# Altium PCB 兔子.PcbDoc
Units mm, origin at the board's own origin, x right, y up, seen from the top; angles counter-clockwise.
Board outline 90.8 x 35.56 mm, 2 copper layers (Top Layer, Bottom Layer); 82 components, 84 nets, 333 pads, 72 vias.
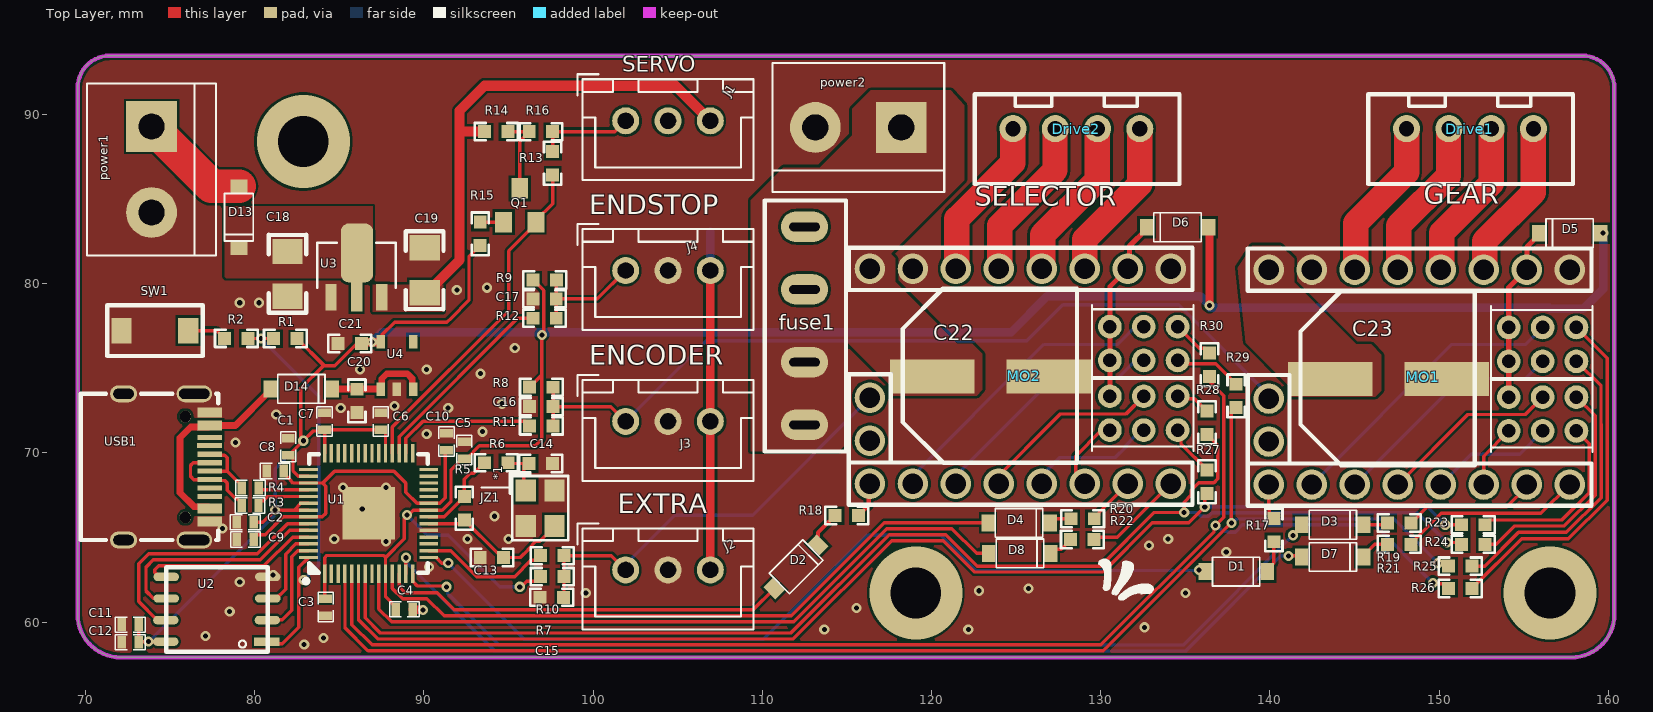
[diagram p0: Top Layer view]
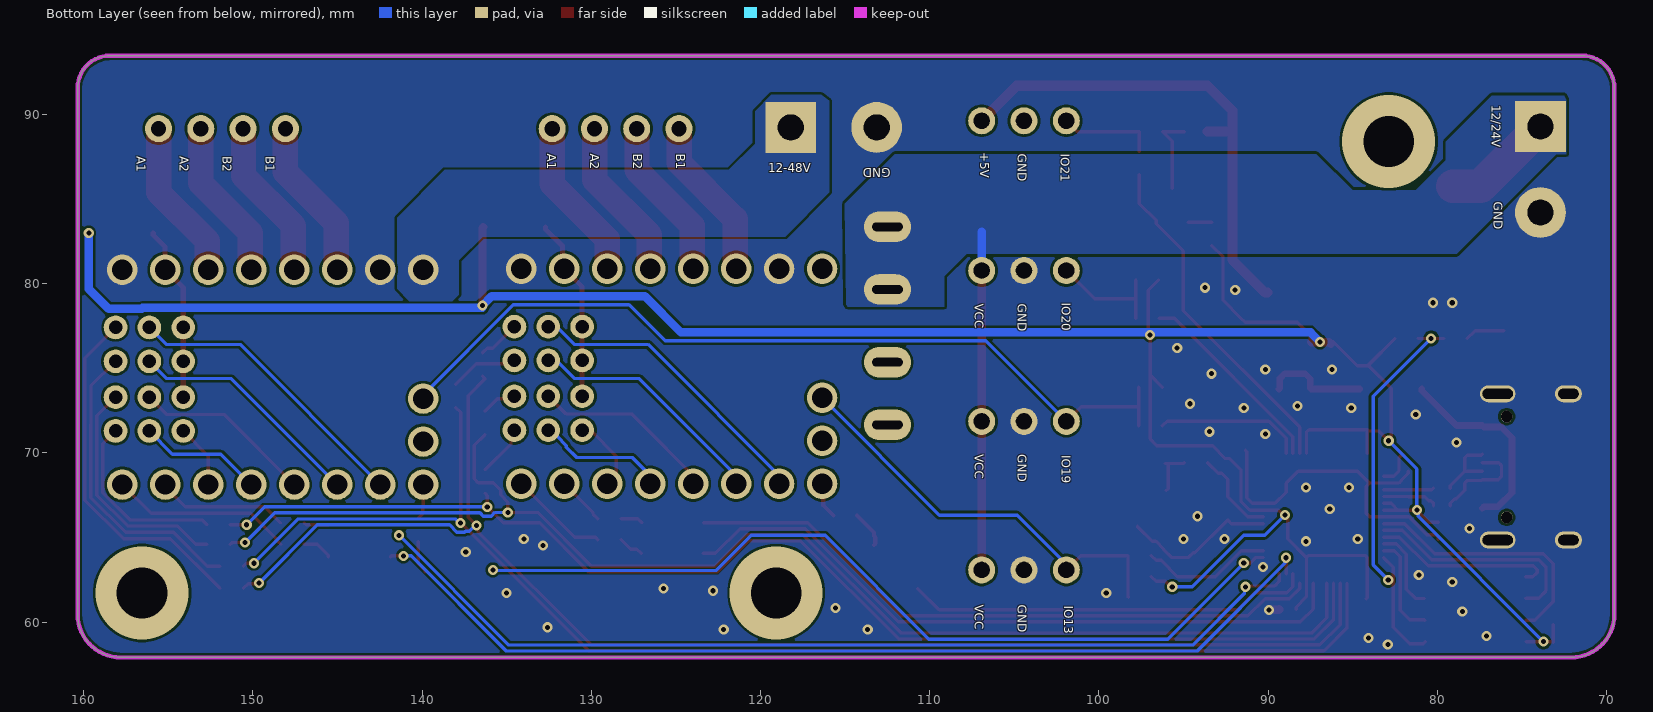
[diagram p1: Bottom Layer view, seen from below]

## Layer stack, top to bottom
Top Solder: solder mask 0.0102, Solder Resist, Dk 3.5
Top Layer: signal copper 0.0356
Dielectric 1: dielectric 0.32, FR-4, Dk 4.8
Bottom Layer: signal copper 0.0356
Bottom Solder: solder mask 0.0102, Solder Resist, Dk 3.5

## Board outline
69.544,60.449 69.544,91.564 cw(c71.449,91.564) 71.449,93.469 158.444,93.469 cw(c158.444,91.564) 160.349,91.564 160.349,60.449 cw(c157.809,60.449) 157.809,57.909 72.084,57.909 cw(c72.084,60.449)

## Design rules (kind name [scope] priority, off if disabled: settings)
Clearance [All] p1: gap=0.152 ignorepadtopadclearanceinfootprint=TRUE
PolygonConnect [All] p1: connectstyle=Direct reliefconductorwidth=0.254 reliefentries=4 polygonreliefangle="90 Angle" airgapwidth=0.254
RoomDefinition POWER [InComponentClass('POWER')] p1: confinementstyle=ConfineIn formatcopy=TRUE lockcomponents=FALSE outline 0,0 50.8,0 50.8,25.4 0,25.4
RoomDefinition Drives [InComponentClass('Drives')] p2: confinementstyle=ConfineIn formatcopy=TRUE lockcomponents=FALSE outline 0,0 50.8,0 50.8,25.4 0,25.4
RoomDefinition 2040 [InComponentClass('2040')] p3: confinementstyle=ConfineIn formatcopy=TRUE lockcomponents=FALSE outline 0,0 50.8,0 50.8,25.4 0,25.4
RoutingVias [All] p1: holewidth=0.711 width=1.27 viastyle="Through Hole" minholewidth=0.711 minwidth=1.27 maxholewidth=0.711 maxwidth=1.27
SolderMaskExpansion [All] p1: expansion=0.102 istentingtop=FALSE
Width [All] p1: maxlimit=10 minlimit=0.1 preferedwidth=0.2
30 further rules are at their usual default settings.

## Classes and differential pairs
component class POWER: C18 C19 C20 C21 D13 D14 fuse1 power1 power2 U3 U4
component class Drives: C22 C23 D1 D2 D3 D4 D5 D6 D7 D8 Drive1 Drive2 MO1 MO2 R17 R18 R19 R20 R21 R22 R23 R24 R25 R26 R27 R28 R29 R30
component class 2040: C1 C2 C3 C4 C5 C6 C7 C8 C9 C10 C11 C12 C13 C14 C15 C16 C17 J1 J2 J3 J4 JZ1 Q1 R1 R2 R3 R4 R5 R6 R7 R8 R9 R10 R11 R12 R13 R14 R15 R16 SW1 U1 U2 USB1

## Components (designator, comment, footprint, x,y, rotation, side; value= is the part's Value field where it differs from the comment)
C1 "0.1UF" C0402 81.991,70.359 r270 top
C2 "0.1UF" C0402 79.451,65.897 r0 top
C3 "0.1UF" C0402 84.201,60.88 r90 top
C4 "0.1UF" C0402 88.847,60.749 r180 top
C5 "0.1UF" C0402 92.395,70.163 r270 top
C6 "0.1UF" C0402 87.462,71.856 r270 top
C7 "0.1UF" C0402 84.138,71.856 r270 top
C8 "0.1UF" C0402 81.212,68.924 r0 top
C9 "0.1UF" C0402 79.459,64.881 r0 top
C10 "0.1UF" C0402 91.342,70.663 r270 top
C11 "2.2UF" C0402 72.652,59.846 r0 top
C12 "0.1UF" C0402 72.652,58.804 r0 top
C13 "22PF" 0603C 95.317,64.369 r180 top
C14 "22PF" 0603C 98.199,69.921 r180 top
C15 "10UF" 0603C 96.266,60.909 r0 top
C16 "10UF" 0603C 95.656,72.18 r0 top
C17 "10UF" 0603C 95.842,78.543 r0 top
C18 "2.2UF" 1206 81.145,82.171 r270 top
C19 "2.2UF" 1206 90.843,79.193 r90 top
C20 "1UF" 0603 85.494,74.356 r270 top
C21 "1UF" 0603 86.914,77.011 r180 top
C22 "100UF/63V" 10*10.5电解电容 123.444,74.519 r90 top
C23 "100UF/63V" 10*10.5电解电容 146.952,74.371 r90 top
D1 "BAT54W" SOD-123 137.998,62.954 r0 top
D2 "BAT54W" SOD-123 112.014,63.246 r45 top
D3 "BAT54W" SOD-123 143.713,65.722 r0 top
D4 "BAT54W" SOD-123 125.171,65.837 r0 top
D5 "BAT54W" SOD-123 157.709,82.998 r180 top
D6 "BAT54W" SOD-123 134.539,83.354 r180 top
D7 "BAT54W" SOD-123 143.713,63.817 r0 top
D8 "BAT54W" SOD-123 125.222,64.033 r0 top
D13 "BAT54W" SOD-123 79.045,83.922 r270 top
D14 "BAT54W" SOD-123 82.758,73.756 r0 top
Drive1 "XH2.54-4" XH2.54-4 145.531,91.186 r0 top
Drive2 "XH2.54-4" XH2.54-4 122.276,91.186 r0 top
fuse1 "fuse" 保险丝小号 115.547,69.854 r90 top
J1 "XH2.54-3" JST_XH_B3B-XH-A_1X03_P2.50MM_VERTICAL -7.291,219.158 r0 top
J2 "XH2.54-3" JST_XH_B3B-XH-A_1X03_P2.50MM_VERTICAL -7.291,192.618 r0 top
J3 "XH2.54-3" JST_XH_B3B-XH-A_1X03_P2.50MM_VERTICAL -7.291,201.396 r0 top
J4 "XH2.54-3" JST_XH_B3B-XH-A_1X03_P2.50MM_VERTICAL -7.291,210.312 r0 top
JZ1 "8MHZ" OSC-3225-4P 96.873,66.714 r270 top
MO1 "AXIS-SPI-UART" AXIS-SPI-UART 159.479,66.873 r90 top
MO2 "AXIS-SPI-UART" AXIS-SPI-UART 135.907,66.924 r90 top locked
power1 "KF-7.62-2P" TERMINALBLOCK_BORNIER-2_P5.08MM_2 155.194,-28.829 r180 top
power2 "KF-7.62-2P" TERMINALBLOCK_BORNIER-2_P5.08MM_2 0.102,7.95 r90 top
Q1 "AO3400" SOT-23 94.592,82.679 r0 top
R1 "10K" 0603 83.109,77.305 r180 top
R2 "1K" 0603 80.216,77.311 r180 top
R3 "27R" R0402 79.731,66.881 r0 top
R4 "27R" R0402 79.748,67.914 r0 top
R5 "1M-DNP" 0603 91.841,68.014 r270 top
R6 "1K" 0603 92.986,68.86 r0 top
R7 "10K" 0603 98.885,63.24 r180 top
R8 "10K" 0603 98.24,74.43 r180 top
R9 "10K" 0603 98.439,80.767 r180 top
R10 "1K" 0603 96.301,63.368 r0 top
R11 "1K" 0603 95.656,71.037 r0 top
R12 "1K" 0603 95.842,77.4 r0 top
R13 "0R-DNP" 0603 97.058,88.408 r270 top
R14 "806R" 0603 95.57,89.532 r180 top
R15 "10K" 0603 93.885,81.645 r90 top
R16 "0R" 0603 98.212,89.53 r180 top
R17 "100R" 0603 139.681,66.729 r270 top
R18 "100R" 0603 116.284,66.846 r180 top
R19 "100R" 0603 148.936,66.403 r180 top
R20 "100R" 0603 130.218,66.657 r180 top
R21 "100R" 0603 148.936,65.145 r180 top
R22 "100R" 0603 130.206,65.427 r180 top
R23 "6.8K" 0603 150.722,65.196 r0 top
R24 "6.8K" 0603 150.722,64.038 r0 top
R25 "6.8K" 0603 149.952,62.752 r0 top
R26 "6.8K" 0603 149.952,61.432 r0 top
R27 "6.8K" 0603 136.83,67.005 r90 top
R28 "6.8K" 0603 136.83,70.482 r90 top
R29 "6.8K" 0603 138.552,72.069 r90 top
R30 "6.8K" 0603 136.977,73.919 r90 top
SW1 "3*4*2H" K 76.861,78.716 r180 top
U1 "" RP2040 86.748,66.403 r90 top
U2 "" SOP-8 80.754,58.217 r90 top
U3 "MD7350H" SOT-89 86.541,79.934 r0 top
U4 "MIC5225-3.3" SOT23-5 86.737,73.056 r0 top
USB1 "TYPEC-304-BCP16" USB-C-SMD_TYPEC-304-BCP16 74.803,69.164 r270 top

## Footprints (in the part's own frame and the unit in brackets; to place one, negate y for a bottom-side part, rotate by r counter-clockwise, add the part's x,y. Pads: shape width x height; smd on the part's side, far side on the other; paste and mask are expansions set on the pad)
10*10.5电解电容 [mm]
  rect 2x5 smd: 1(0,3.4) 2(0,-3.5)
  silkscreen extent -5.1,-5.15 5.18,5.15, body extent -5.12,-5.83 5.18,5.77, height 10.2
0603 [mil]
  rect 30x30 smd: 1(23.62,21.81) 2(78.12,21.75)
  silkscreen extent 1,2 101,42, body extent 19,6 82,38, height 21
0603C [mil]
  rect 30x30 smd: 1(23.62,21.81) 2(78.12,21.75)
  silkscreen extent 1,2 101,42, body extent 20,6 82,38, height 35
1206 [mm]
  rect 1.5x1.8 smd: 1(0.275,0.8) 2(2.925,0.8)
  silkscreen extent -0.71,-0.31 3.9,1.92
AXIS-SPI-UART [mm]
  round 1.8 hole 1.2: 1(1.25,19.55) 2(1.25,17.01) 3(1.25,14.47) 4(1.25,11.93) 5(1.25,9.39) 6(1.25,6.85) 7(1.25,4.31) 8(1.25,1.77) 9(13.95,1.77) 10(13.95,4.31) 11(13.95,6.85) 12(13.95,9.39) 13(13.95,11.93) 14(13.95,14.47) 15(13.95,17.01) 16(13.95,19.55) 29(3.79,19.55) 30(6.33,19.55)
  round 1.4 hole 0.8: 17(4.418,5.368) 18(4.418,3.368) 19(4.418,1.368) 20(6.418,1.368) 21(6.418,3.368) 22(6.418,5.368) 23(8.534,5.368) 24(8.534,3.368) 25(8.534,1.368) 26(10.534,1.368) 27(10.534,3.368) 28(10.534,5.368)
  silkscreen extent 0,0.42 15.2,20.8, body extent 0,0.33 15.25,20.91, height 8.5
C0402 [mm]
  rect 0.5x0.762 smd: 1(0.5,0) 2(-0.5,0)
  silkscreen extent -0.87,-0.46 0.87,0.45, body extent -0.5,-0.25 0.5,0.25, height 0.49
JST_XH_B3B-XH-A_1X03_P2.50MM_VERTICAL [mm]
  round 1.6 hole 0.9: 1(109.22,-129.54) 2(111.72,-129.54) 3(114.22,-129.54)
  round 0 hole 0.95 slot 0.955 at 0 deg: 2(111.72,-129.54) 3(114.22,-129.54) roundrect(109.22,-129.54)
  silkscreen extent 106.37,-133.05 116.78,-126.79, body extent 106.77,-132.92 116.67,-127.17, height 7
K [mm]
  rect 1.2x1.5 smd: 1(0.775,1.5) 2(4.725,1.5)
  silkscreen extent -0.08,0 5.58,3
OSC-3225-4P [mm]
  rect 1.3x1.2 smd: 1(-1.061,-0.852) 2(1.039,-0.852) 3(1.039,0.848) 4(-1.061,0.848)
  silkscreen extent -2.04,-1.75 1.89,1.65, body extent -1.63,-1.28 1.57,1.22, height 0.7
R0402 [mm]
  rect 0.5x0.762 smd: 1(0.5,0) 2(-0.5,0)
  silkscreen extent -0.87,-0.46 0.87,0.45, body extent -0.49,-0.25 0.5,0.26, height 0.38
RP2040 [mm]
  rect 1.1x0.2 smd: 1(-3.538,2.611) 2(-3.538,2.211) 3(-3.538,1.811) 4(-3.538,1.411) 5(-3.538,1.011) 6(-3.538,0.611) 7(-3.538,0.211) 8(-3.538,-0.189) 9(-3.538,-0.589) 10(-3.538,-0.989) 11(-3.538,-1.389) 12(-3.538,-1.789) 13(-3.538,-2.189) 14(-3.538,-2.589) 29(3.562,-2.589) 30(3.562,-2.189) 31(3.562,-1.789) 32(3.562,-1.389) 33(3.562,-0.989) 34(3.562,-0.589) 35(3.562,-0.189) 36(3.562,0.211) 37(3.562,0.611) 38(3.562,1.011) 39(3.562,1.411) 40(3.562,1.811) 41(3.562,2.211) 42(3.562,2.611)
  rect 0.2x1.1 smd: 15(-2.588,-3.539) 16(-2.188,-3.539) 17(-1.788,-3.539) 18(-1.388,-3.539) 19(-0.988,-3.539) 20(-0.588,-3.539) 21(-0.188,-3.539) 22(0.212,-3.539) 23(0.612,-3.539) 24(1.012,-3.539) 25(1.412,-3.539) 26(1.812,-3.539) 27(2.212,-3.539) 28(2.612,-3.539) 43(2.612,3.561) 44(2.212,3.561) 45(1.812,3.561) 46(1.412,3.561) 47(1.012,3.561) 48(0.612,3.561) 49(0.212,3.561) 50(-0.188,3.561) 51(-0.588,3.561) 52(-0.988,3.561) 53(-1.388,3.561) 54(-1.788,3.561) 55(-2.188,3.561) 56(-2.588,3.561)
  rect 3.1x3.1 smd: 57(0.012,0.011)
  silkscreen extent -4.11,-3.49 3.51,3.84
SOD-123 [mm]
  rect 0.8x1 smd: 1(-1.829,0.025) 2(1.829,0.025)
  silkscreen extent -1.4,-0.82 1.4,0.88, body extent -1.9,-0.86 1.95,0.84, height 1.43
SOP-8 [mm]
  rect 0.5x1.5 smd: 1(0.625,0.025)
  oval 0.5x1.5 smd: 2(1.895,0) 3(3.175,-0.025) 4(4.45,-0.025) 5(4.45,5.975) 6(3.175,5.975) 7(1.895,6) 8(0.625,6)
  silkscreen extent 0.03,-0.03 5.03,5.97, body extent 0.07,-0.12 4.98,6.07, height 1.75
SOT23-5 [mm]
  rect 0.5x0.8 smd: 1(0.725,0.7) 2(1.675,0.7) 3(2.625,0.7) 4(2.625,3.5) 5(0.725,3.5)
SOT-23 [mm]
  rect 1x1.2 smd: 1(0.125,0.95) 2(2.025,0.95) 3(1.075,2.95)
  body extent -0.43,0.65 2.57,3.05, height 1.05
SOT-89 [mm]
  rect 0.672x1.575 smd: 1(-2.024,-0.749) 3(0.976,-0.749)
  rect 0.672x1.8 smd: 2(-0.515,-0.68)
  rrect50% 1.9x3.5 smd: 2(-0.493,1.88)
  silkscreen extent -2.85,-0.17 1.8,2.48
TERMINALBLOCK_BORNIER-2_P5.08MM_2 [mm]
  rect 3x3 hole 1.52 slot 1.525 at 90 deg: 1(81.28,-118.11)
  round 3 hole 1.52 slot 1.525 at 90 deg: 2(81.28,-113.03)
  silkscreen extent 77.47,-120.65 85.09,-110.49
USB-C-SMD_TYPEC-304-BCP16 [mm]
  oval 1x2.099 hole 0.6 slot 1.8 at 90 deg: 13(-4.32,1.633) 14(4.32,1.633)
  oval 1x1.599 hole 0.6 slot 1.2 at 90 deg: 15(-4.32,-2.547) 16(4.32,-2.547)
  rect 0.6x1.45 smd: A1B12(-3.225,2.547) A4B9(-2.45,2.547) B1A12(3.22,2.547) B4A9(2.45,2.547)
  rect 0.3x1.45 smd: A5(-1.26,2.532) A6(-0.25,2.547) A7(0.25,2.547) A8(1.25,2.547) B5(1.75,2.547) B6(0.75,2.547) B7(-0.75,2.547) B8(-1.75,2.547)
  round 0.7 hole 0.7 unplated: ""(-2.98,1.102) ""(2.98,1.102)
  silkscreen extent -4.32,-5.08 4.32,3.05, body extent -4.47,-5.06 4.47,2.84, height 3.28
XH2.54-4 [mm]
  round 1.6 hole 0.9: 1(2.54,-2.032) 2(5.04,-2.032) 3(7.54,-2.032) 4(10.033,-2.032)
  silkscreen extent 0.28,-5.3 12.37,0, body extent 0.07,-5.47 12.48,0.28, height 7
保险丝小号 [mm]
  oval 1.8x2.8 hole 1.8 slot 0.5 at 0 deg: 1(1.8,3.05) 1(5.5,3.05) 2(9.8,3.05) 2(13.5,3.05)
  silkscreen extent 0.22,0.6 15.05,5.4

## Part data
C1 C2 C3 C4 C5 C6 C7 C8 C9 C10 C11 C12 C18 C19 C20 C21: library part C
C13 C14 C15 C16 C17: library part 0603C
C22 C23: library part 降压电容
D1 D2 D3 D4 D5 D6 D7 D8 D13 D14: library part Diode, "BAT46W"
JZ1: library part JZ3225
Q1: library part S8050
R1 R2 R5 R6 R7 R8 R9 R10 R11 R12: library part 0603R
R3 R4 R13 R14 R15 R16 R17 R18 R19 R20 R21 R22 R23 R24 R25 R26 R27 R28 R29 R30: library part R
SW1: library part RESET
U1: library part RP2040
U2: library part W25Q16JVSSIQ
USB1: BOM_Manufacturer=XUNPU, BOM_Manufacturer Part=TYPEC-304-BCP16, BOM_Supplier=LCSC, BOM_Supplier Part=C720629, Contributor=LCSC, spicePre=U, spiceSymbolName=TYPEC-304-BCP16

## Free pads (board coordinates)
  round 5.5 on Top Solder: 2(82.879,88.389) 2(119.074,61.719) 2(156.539,61.719)
  round 5.5 on Bottom Solder: 2(82.879,88.389) 2(119.074,61.719) 2(156.539,61.719)

## Via types
v1: diameter 0.6, hole 0.3, Top Layer to Bottom Layer, tented both sides, 69 vias
v2: diameter 5.5, hole 3, Top Layer to Bottom Layer, tented both sides, 3 vias

## Nets (pads, with @x,y where several pads share a name; then routed paths per layer and width w, separated by ;. In a path a pad name is that pad's centre, name@x,y a point inside that pad or via, vN(x,y) a via of type N, cw(c..) or ccw(c..) an arc to the next point about the centre after c; other vN are vias at no path point)
+1.1V: C8.1 C9.1 C10.1 U1.23 U1.45 U1.50 | length 21.1
  Top Layer w0.2: C9.1 79.959,65.012 80.109,65.162 80.625,65.162 81.678,66.215 U1.50 84.001,66.215 84.201,66.415 84.201,68.037 84.023,68.215 ; C8.1 81.712,68.792 82.125,68.379 82.125,68.356 82.267,68.215 U1.45 84.023,68.215 ; C10.1 91.255,70.075 91.255,67.335 90.935,67.015 U1.23 89.596,67.015 88.938,67.674 88.938,68.215 88.238,68.914 84.722,68.914 84.023,68.215
+3.3V: C1.1 C2.1 C3.1 C4.1 C5.1 C6.1 C7.1 C11.1 C12.1 C21.1 D5.1 D6.1 R1.1 R7.2 R8.2 R9.2 R15.1 U1.1 U1.10 U1.22 U1.33 U1.42 U1.44 U1.48 U1.49 U2.8 U4.5 | length 181.5
  Top Layer w0.2: C11.1 C12.1 73.189,58.842 v1(73.736,58.842) U2.8 ; C2.1 80.494,65.897 v1(81.212,66.615) 82.338,66.615 ; C1.1 82.122,69.859 82.272,69.709 82.272,68.924 82.581,68.615 U1.44 ; C1.1@82.074,69.907 v1(82.879,70.712) ; R1.1 84.072,75.189 84.072,75.145 ; U1.49 82.338,66.615 ; U1.48 82.738,67.015 82.338,66.615 ; U1.42 C7.1 ; C3.1 84.138,61.444 U1.1 84.138,63.797 84.274,63.933 87.619,63.933 87.738,63.815 ; C21.1@86.314,76.556 86.146,76.556 84.735,75.145 84.072,75.145 ; U4.5@87.517,76.611 87.517,76.962 88.269,77.714 91.367,77.714 91.607,77.954 92.667,79.014 92.667,81.581 R15.1 ; U1.33 87.738,71.206 87.588,71.356 C6.1 C7.1 ; C4.1 88.347,60.88 87.738,61.49 U1.10 87.738,63.815 ; v1(95.667,62.081) 95.765,62.081 96.09,62.406 96.62,62.406 R7.2 ; R8.2 96.977,74.599 ; R9.2 97.076,79.594 v1@97.076,77.169 ; v1(96.977,76.962) 96.977,74.599 ; v1(82.879,70.712) 82.738,70.854 82.738,73.811 84.072,75.145 ; v1(82.879,70.712) 83.456,71.289 84.071,71.289 C7.1 ; 87.738,63.815 88.847,64.925 88.847,66.101 89.362,66.615 U1.22 91.076,66.615 91.607,67.146 91.607,69.006 92.264,69.663 C5.1 92.526,69.663 93.288,70.424 96.586,70.424 96.977,70.815 96.977,74.599
  Top Layer w0.5: C21.1 86.395,76.539 87.445,76.539 U4.5 ; D6.1 136.425,83.272 v1(136.425,78.711)
  Bottom Layer w0.2: v1(73.736,58.842) 81.135,66.241 81.135,66.538 v1(81.212,66.615) 81.212,69.045 v1(82.879,70.712) ; v1(89.014,66.319) 90.208,65.126 91.445,65.126 94.49,62.081 v1(95.667,62.081)
  Bottom Layer w0.5: v1(86.937,76.556) 87.496,77.114 96.977,77.114 124.697,77.114 126.831,79.248 135.888,79.248 v1(136.425,78.711) ; v1@136.425,78.56 156.516,78.56 156.567,78.51 158.52,78.51 159.69,79.68 v1(159.69,82.982)
+5V: C19.1 J1.3 R14.2 U3.3 | length 29.5
  Top Layer w0.6: C19.1 90.193,79.468 92.114,81.389 92.114,88.978 ; R14.2 92.116,88.979 92.114,88.978 ; J1.3@106.929,89.619 104.854,91.694 93.585,91.694 92.114,90.223 92.114,88.978
DIAG0: C15.2 J2.1 MO2.30 R7.1 R10.2 | length 24.6
  Top Layer w0.2: C15.2 98.285,61.497 R7.1 R10.2 101.087,63.92 J2.1@101.413,63.594
  Bottom Layer w0.2: J2.1 101.929,63.423 104.826,66.319 109.423,66.319 MO2.30
DIAG1: C16.2 J3.1 MO1.30 R8.1 R11.2 | length 50.2
  Top Layer w0.2: R11.2 C16.2 ; R8.1 C16.2 ; J3.1 101.052,72.733 C16.2
  Bottom Layer w0.2: J3.1 106.685,76.612 125.634,76.612 127.768,78.746 134.599,78.746 139.929,73.416 MO1.30
DIAG2: C17.2 J4.1 R9.1 R12.2 | length 7.1
  Top Layer w0.2: R12.2 C17.2 ; R9.1 97.826,80.2 C17.2 ; J4.1 100.253,79.096 C17.2
Drives0-DIR: D8.1 U1.9 | length 40.8
  Top Layer w0.2: 87.341,62.287 87.341,60.767 88.093,60.015 111.859,60.015 117.354,65.51 121.209,65.51 122.66,64.059 D8.1
Drives0-EN: D2.1 U1.12 | length 24
  Top Layer w0.2: U1.12 88.538,62.084 88.773,61.849 88.786,61.849 88.9,61.735 90.792,61.735 91.807,60.72 109.452,60.72 D2.1
Drives0-STEP: D4.1 U1.11 | length 38.5
  Top Layer w0.2: 88.141,62.287 88.141,61.983 88.741,61.382 90.181,61.382 91.196,60.368 111.713,60.368 117.208,65.862 D4.1
Drives1-DIR: D7.1 U1.13 | length 58.7
  Top Layer w0.2: U1.13 v1(88.938,63.797) ; v1(141.097,63.906) 141.821,63.906 D7.1
  Bottom Layer w0.2: v1(88.938,63.797) 89.014,63.72 89.014,63.466 94.192,58.288 135.012,58.288 140.63,63.906 v1(141.097,63.906)
Drives1-EN: D1.1 U1.15 | length 50.9
  Top Layer w0.2: U1.15 90.738,63.815 91.07,63.483 v1(91.445,63.483)
  Bottom Layer w0.2: v1(91.445,63.483) 95.876,59.051 95.935,58.993 110.047,58.993 116.18,65.126 120.548,65.126 122.631,63.043 135.776,63.043 v1(135.813,63.079)
Drives1-STEP: D3.1 U1.14 | length 56.9
  Top Layer w0.2: U1.14 89.338,62.415 89.626,62.127 91.296,62.127 v1(91.342,62.081)
  Bottom Layer w0.2: v1(91.342,62.081) 91.398,62.025 91.398,61.688 94.445,58.64 134.866,58.64 v1(141.351,65.126)
Drives_power: C22.1 C23.1 fuse1.1 MO1.16 MO2.16 power2.1
GND: C1.2 C2.2 C3.2 C4.2 C5.2 C6.2 C7.2 C8.2 C9.2 C10.2 C11.2 C12.2 C13.2 C14.1 C15.1 C16.1 C17.1 C18.2 C19.2 C20.2 C21.2 C22.2 C23.2 J2.2 J3.2 J4.2 JZ1.2 JZ1.4 MO1.9 MO1.15 MO2.9 MO2.15 power1.2 power2.2 SW1.2 U1.19 U1.57 U2.4 U3.1 U4.2 USB1.13 USB1.14 USB1.15 USB1.16 USB1.A1B12 USB1.B1A12 | length 0.6
  Top Layer w0.5: C4.2 89.347,60.723 89.932,60.723 v1(89.951,60.704)
  other v1: 82.931,58.674 84.074,59.055 77.089,59.182 113.665,59.563 122.174,59.563 132.588,59.69 78.529,60.622 115.57,60.833 99.568,61.722 135.001,61.722 122.809,61.849 125.73,61.976 79.121,62.357 81.099,62.784 90.297,63.246 137.414,64.135 132.842,64.516 87.757,64.77 84.709,64.897 92.583,64.897 94.996,64.897 133.985,64.897 78.105,65.532 94.17,66.252 86.36,66.675 85.217,67.945 87.757,67.945 78.867,70.612 90.17,71.12 93.472,71.247 81.28,72.263 85.09,72.644 91.44,72.644 88.265,72.771 94.615,72.898 93.345,74.676 86.233,74.93 90.17,74.93 95.377,76.2 79.121,78.867 80.264,78.867 91.948,79.629 93.726,79.756
MOT_CS/UART0: R24.1 R28.1 U1.7 | length 78.8
  Top Layer w0.2: 86.541,62.287 86.541,60.242 87.431,59.352 111.694,59.352 117.5,65.157 120.847,65.157 122.698,63.306 129.986,63.306 133.155,66.475 v1(134.931,66.475) 134.931,67.091 135.35,67.51 135.35,67.799 135.79,68.239 136.692,68.239 136.911,68.458 136.911,70.447 R28.1 ; v1(150.452,64.7) 151.214,64.7 R24.1
  Bottom Layer w0.2: v1(134.931,66.475) 135.69,66.475 135.915,66.25 136.373,66.25 136.573,66.45 148.703,66.45 v1(150.452,64.7)
MOT_CS/UART1: U1.8
MOT_MISO: R23.1 R27.1 U1.6 | length 73.9
  Top Layer w0.2: 86.141,62.287 86.141,60.144 87.285,58.999 111.84,58.999 117.646,64.805 120.701,64.805 122.552,62.954 130.132,62.954 133.04,65.862 135.204,65.862 v1(136.144,66.802) 136.144,67.474 R27.1 ; v1(150.36,65.748) R23.1@151.32,65.748
  Bottom Layer w0.2: v1(136.144,66.802) 149.306,66.802 v1(150.36,65.748)
MOT_MOSI: R26.1 R30.1 U1.5 | length 82.2
  Top Layer w0.2: 85.741,62.287 85.741,59.846 86.94,58.647 130.004,58.647 136.694,65.338 136.694,65.621 v1(136.771,65.697) ; R30.1 136.277,74.373 137.276,73.374 137.276,66.202 136.791,65.718 v1@136.791,65.677 ; v1(149.631,62.306) 149.67,62.267 150.271,62.267 R26.1
  Bottom Layer w0.2: v1(136.771,65.697) 136.879,65.697 137.209,65.367 137.431,65.367 137.488,65.31 137.946,65.31 138.375,65.738 146.199,65.738 v1(149.631,62.306)
MOT_SCK: R25.1 R29.1 U1.4 | length 79.7
  Top Layer w0.2: 85.341,62.287 85.341,59.652 86.699,58.295 130.15,58.295 v1(137.717,65.862) 137.717,72.388 R29.1 ; v1(149.936,63.475) 150.384,63.475 R25.1
  Bottom Layer w0.2: v1(137.717,65.862) 137.806,65.862 138.034,66.091 147.32,66.091 v1(149.936,63.475)
NetC13_1: C13.1 JZ1.3 R5.2 U1.20 | length 9.3
  Top Layer w0.2: U1.20 92.178,65.815 R5.2 94.327,64.096 94.436,64.096 C13.1 95.707,63.815 96.166,64.275 96.166,64.306 96.626,64.766 96.862,64.766 97.721,65.625 JZ1.3
NetC14_2: C14.2 JZ1.1 R6.2 | length 2.8
  Top Layer w0.2: R6.2 95.015,69.367 C14.2@95.91,69.367 ; JZ1.1 95.91,67.885 C14.2@95.91,69.368 ; C14.2@96.097,69.368 C14.2@95.91,69.368
NetC18_1: C18.1 D13.2 U3.2
NetC20_1: C20.1 D14.2 U4.1 U4.3 | length 6.2
  Top Layer w0.39: D14.2 84.6,73.768 87.449,73.768 U4.1 87.517,73.811 87.517,74.379 87.814,74.676 89.027,74.676 89.307,74.396 89.307,73.811 U4.3
NetD1_2: D1.2 R17.2 | length 1.9
  Top Layer w0.2: D1.2 139.827,63.079 140.233,63.486 R17.2
NetD2_2: D2.2 R18.2 | length 2.2
  Top Layer w0.254: D2.2 113.218,64.628 113.218,65.014 113.289,65.085 113.289,65.283 R18.2
NetD3_2: D3.2 R19.2 | length 1.5
  Top Layer w0.2: D3.2 146.848,65.748 R19.2
NetD4_2: D4.2 R20.2 | length 1.3
  Top Layer w0.2: D4.2 127.243,66.105 R20.2
NetD5_2: D5.2 MO1.10 MO1.22 MO1.23 MO1.28 | length 10.4
  Top Layer w0.3: MO1.22 MO1.23 MO1.28 154.111,79.765 MO1.10 155.18,80.835 155.18,82.173 155.88,82.872 D5.2
NetD6_2: D6.2 MO2.10 MO2.22 MO2.23 MO2.28 | length 10.9
  Top Layer w0.3: MO2.22 MO2.23 MO2.28 130.539,79.816 MO2.10 131.705,80.981 131.705,82.224 132.711,83.229 D6.2
NetD7_2: D7.2 R21.2 | length 1.8
  Top Layer w0.2: D7.2 145.542,63.943 146.191,64.592 R21.2
NetD8_2: D8.2 R22.2 | length 1.5
  Top Layer w0.2: D8.2 127.302,64.31 127.658,64.31 R22.2
NetDrive1_1: Drive1.1 MO1.14 | length 9.6
  Top Layer w1.5: MO1.14 145.066,80.88 145.066,83.573 148.071,86.578 Drive1.1
NetDrive1_2: Drive1.2 MO1.13 | length 9.6
  Top Layer w1.5: MO1.13 147.606,80.88 147.606,83.42 150.552,86.366 150.552,89.135 Drive1.2
NetDrive1_3: Drive1.3 MO1.12 | length 9.6
  Top Layer w1.5: MO1.12 150.146,80.88 150.146,82.998 153.071,85.923 Drive1.3
NetDrive1_4: Drive1.4 MO1.11 | length 9.5
  Top Layer w1.5: MO1.11 152.686,80.88 152.686,82.506 155.564,85.384 Drive1.4
NetDrive2_1: Drive2.1 MO2.14 | length 9.7
  Top Layer w1.5: MO2.14 121.495,80.931 121.495,83.827 124.796,87.128 124.796,89.135 Drive2.1
NetDrive2_2: Drive2.2 MO2.13 | length 9.7
  Top Layer w1.5: MO2.13 124.035,80.931 124.035,83.429 127.296,86.691 127.296,89.135 Drive2.2
NetDrive2_3: Drive2.3 MO2.12 | length 9.6
  Top Layer w1.5: MO2.12 126.575,80.931 126.575,82.888 129.796,86.11 129.796,89.135 Drive2.3
NetDrive2_4: Drive2.4 MO2.11 | length 9.6
  Top Layer w1.5: MO2.11 129.057,82.626 132.309,85.877 Drive2.4
NetJ1_1: J1.1 R13.1 R16.1 | length 5.8
  Top Layer w0.2: R13.1 R16.1 101.287,88.976 J1.1
NetMO1_1: MO1.1 R17.1 | length 2.1
  Top Layer w0.2: MO1.1 139.929,66.91 139.954,66.884 139.954,66.41 R17.1
NetMO1_2: MO1.2 MO1.27 | length 17.5
  Bottom Layer w0.2: MO1.2 150.749,76.403 155.107,76.403 MO1.27
NetMO1_3: MO1.3 MO1.24 | length 14.1
  Bottom Layer w0.2: MO1.3 151.275,74.389 155.092,74.389 MO1.24
NetMO1_4: MO1.4 MO1.21 | length 10.7
  Top Layer w0.2: MO1.4 151.689,72.263 155.083,72.263 MO1.21
NetMO1_5: MO1.5 MO1.18 | length 7.3
  Bottom Layer w0.2: MO1.5 151.892,69.926 154.746,69.926 MO1.18
NetMO1_6: MO1.6 MO1.17 | length 3.8
  Top Layer w0.2: MO1.6 152.629,69.808 MO1.17
NetMO1_7: MO1.7 R19.1 | length 7.9
  Top Layer w0.2: R19.1 149.288,66.802 154,66.802 155.169,67.97 MO1.7
NetMO1_8: MO1.8 R21.1 | length 10.9
  Top Layer w0.2: R21.1 148.617,64.872 148.617,64.918 150.12,66.421 156.007,66.421 MO1.8
NetMO1_19: MO1.19 R23.2 | length 10.9
  Top Layer w0.2: R23.2 152.987,66.029 157.244,66.029 158.861,67.645 158.861,69.535 158.857,69.54 158.857,70.544 MO1.19
NetMO1_20: MO1.20 R24.2 | length 14
  Top Layer w0.2: R24.2 153.374,64.591 154.46,65.677 157.39,65.677 159.213,67.499 159.213,69.681 159.209,69.686 159.209,72.192 MO1.20
NetMO1_25: MO1.25 R25.2 | length 18
  Top Layer w0.2: R25.2 152.687,63.305 154.686,65.303 157.516,65.303 159.566,67.354 159.566,71.701 159.561,71.706 159.561,73.956 MO1.25
NetMO1_26: MO1.26 R26.2 | length 21.1
  Top Layer w0.2: R26.2 154.87,64.918 157.628,64.918 159.918,67.208 159.918,75.6 MO1.26
NetMO2_1: MO2.1 R18.1 | length 2.2
  Top Layer w0.254: R18.1 116.285,66.893 116.285,68.101 MO2.1
NetMO2_2: MO2.2 MO2.27 | length 17.5
  Bottom Layer w0.2: MO2.2@118.364,68.123 126.644,76.403 131.002,76.403 MO2.27@132.006,77.407
NetMO2_3: MO2.3 MO2.24 | length 14.1
  Bottom Layer w0.2: MO2.3@120.904,68.123 127.17,74.389 130.988,74.389 MO2.24@132.006,75.407
NetMO2_4: MO2.4 MO2.21 | length 11.3
  Top Layer w0.2: MO2.4@123.444,68.123 127.615,72.294 131.492,72.294 MO2.21
NetMO2_5: MO2.5 MO2.18 | length 7.6
  Bottom Layer w0.2: MO2.5@125.984,68.123 127.584,69.723 130.861,69.723 131.47,70.333 131.47,70.43 132.006,70.966 MO2.18@132.006,71.29
NetMO2_6: MO2.6 MO2.17 | length 3.8
  Top Layer w0.2: MO2.6@128.524,68.123 128.524,69.808 MO2.17@130.006,71.29
NetMO2_7: MO2.7 R20.1 | length 2.6
  Top Layer w0.2: R20.1 129.899,66.385 129.899,66.475 131.075,67.651 131.075,68.112 MO2.7@131.064,68.123
NetMO2_8: MO2.8 R22.1 | length 5.6
  Top Layer w0.2: R22.1 129.736,65.002 130.966,65.002 133.615,67.651 MO2.8@133.615,68.112
NetMO2_19: MO2.19 R27.2 | length 3.3
  Top Layer w0.2: MO2.19@134.036,71.29 134.236,71.29 134.74,70.787 134.74,70.527 R27.2
NetMO2_20: MO2.20 R28.2 | length 2.1
  Top Layer w0.2: MO2.20 134.676,73.204 135.539,73.204 R28.2
NetMO2_25: MO2.25 R29.2 | length 4.6
  Top Layer w0.2: MO2.25@134.012,75.402 134.143,75.27 136.791,75.27 137.276,74.785 137.276,74.778 R29.2
NetMO2_26: MO2.26 R30.2 | length 3
  Top Layer w0.2: MO2.26@134.006,77.407 134.59,77.407 135.813,76.184 136.144,76.184 R30.2
NetQ1_1: Q1.1 R15.2 | length 1.4
  Top Layer w0.2: R15.2 Q1.1
NetQ1_3: Q1.3 R14.1 R16.2 | length 4.8
  Top Layer w0.2: R14.1 R16.2 95.667,88.417 Q1.3
NetR2_2: R2.2 SW1.1 | length 2.3
  Top Layer w0.2: SW1.1 77.775,77.216 R2.2
NetR3_1: R3.1 U1.47 | length 3.3
  Top Layer w0.2: R3.1 80.231,67.012 80.381,67.162 80.502,67.162 80.754,67.414 81.712,67.414 ; 81.713,67.415 U1.47
NetR3_2: R3.2 USB1.A6 USB1.B6 | length 5.9
  Top Layer w0.2: USB1.A6 76.378,69.414 76.213,69.249 76.213,68.615 76.414,68.414 USB1.B6 77.401,68.364 78.23,68.364 78.379,68.215 78.379,67.795 78.894,67.281 78.962,67.281 79.231,67.012 R3.2
NetR4_1: R4.1 U1.46 | length 3
  Top Layer w0.2: R4.1 80.347,67.815 U1.46
NetR4_2: R4.2 USB1.A7 USB1.B7 | length 4.3
  Top Layer w0.2: USB1.A7 78.379,68.914 ; USB1.B7 77.4,69.864 78.224,69.864 78.379,69.709 78.379,68.914 ; R4.2 79.248,68.045 78.379,68.914
NetR5_1: R5.1 R6.1 U1.21 | length 5.2
  Top Layer w0.2: U1.21 91.196,66.215 R5.1 92.395,68.432 92.746,68.782 92.954,68.782 R6.1
PWM_servo: Q1.2 R13.2 U1.32 | length 20.4
  Top Layer w0.2: U1.32 88.138,71.524 95.015,78.402 95.015,81.928 96.617,83.529 Q1.2 96.617,83.729 97.611,84.723 R13.2
QSPI_CLK: U1.52 U2.6 | length 13.3
  Top Layer w0.2: U2.6 74.768,61.403 74.016,61.403 73.584,61.835 73.584,63.246 74.016,63.678 80.334,63.678 82.072,65.415 U1.52
QSPI_SD0: U1.53 U2.5 | length 10.8
  Top Layer w0.2: U2.5 74.36,62.667 74.101,62.927 74.101,63.092 74.33,63.322 80.551,63.322 82.244,65.015 U1.53
QSPI_SD1: U1.55 U2.2 | length 6
  Top Layer w0.2: U2.2 80.786,60.144 81.628,60.144 82.188,60.704 82.188,63.863 82.54,64.215 U1.55
QSPI_SD2: U1.54 U2.3 | length 5
  Top Layer w0.2: U2.3 81.279,61.392 81.836,61.948 81.836,64.009 82.442,64.615 U1.54
QSPI_SD3: U1.51 U2.7 | length 15.3
  Top Layer w0.2: U2.7 74.254,60.112 73.152,61.214 73.152,63.449 73.736,64.033 80.163,64.033 81.945,65.815 U1.51
QSPI_SS: R1.2 R2.1 U1.56 U2.1 | length 24.3
  Top Layer w0.2: R2.1 v1(80.368,76.757) 81.121,76.757 R1.2 ; U2.1 80.846,58.725 81.628,58.725 82.605,59.702 82.605,63.232 U1.56
  Bottom Layer w0.2: v1(80.368,76.757) 83.79,73.336 83.79,63.371 v1(82.903,62.484)
STOP-1: R10.1 U1.16 | length 7.8
  Top Layer w0.2: U1.16 91.589,64.215 93.116,62.687 95.371,62.687 96.325,63.641 96.62,63.641 R10.1
STOP-2: R11.1 U1.30 | length 8.7
  Top Layer w0.2: U1.30 88.938,70.859 89.951,71.872 95.975,71.872 R11.1
STOP-3: R12.1 U1.31 | length 11.8
  Top Layer w0.2: U1.31 88.538,70.957 95.534,77.954 R12.1
USB5V: D14.1 USB1.A4B9 USB1.B4A9 | length 12
  Top Layer w0.39: USB1.B4A9 77.246,66.819 76.411,66.819 75.59,67.64 75.59,70.891 76.223,71.523 77.26,71.523 USB1.A4B9 78.862,71.614 80.929,73.681 D14.1
VCC: D13.1 fuse1.2 J2.3 J3.3 J4.3 power1.1 | length 26.6
  Top Layer w0.5: J2.3@106.929,63.078 106.929,71.856 J4.3@106.929,80.772
  Top Layer w2: power1.1 77.445,85.75 D13.1
  Bottom Layer w0.5: J4.3@106.929,80.772 106.929,83.063
pads on no net: J1.2 J1.roundrect J2.roundrect J3.roundrect J4.roundrect MO1.29 MO2.29 U1.2 U1.3 U1.17 U1.18 U1.24 U1.25 U1.26 U1.27 U1.28 U1.29 U1.34 U1.35 U1.36 U1.37 U1.38 U1.39 U1.40 U1.41 U1.43 U4.4 USB1. USB1.A5 USB1.A8 USB1.B5 USB1.B8
copper on no net:
  other v2: 119.074,61.719 156.539,61.719 82.879,88.389

## Polygon pours and split planes (outlines as drawn)
GND on Top Layer "GND_L01_P008" (solid, pour order 8): 72.009,57.912 cw(c72.009,60.452) 69.469,60.452 69.469,91.694 cw(c71.247,91.694) 71.247,93.472 158.369,93.472 cw(c158.369,91.44) 160.401,91.44 160.401,60.452 cw(c157.861,60.452) 157.861,57.912
Drives_power on Top Layer "DRIVES_POWER_L01_P006" (solid, pour order 6): 141.071,73.324 146.231,73.324 146.583,73.676 146.583,75.794 145.974,76.403 145.095,76.403 141.427,80.071 141.427,81.455 140.64,82.242 138.957,82.242 138.1,80.931 138.582,76.492 141.071,74.003
Drives_power on Top Layer "DRIVES_POWER_L01_P005" (solid, pour order 5): 117.5,73.374 122.66,73.374 123.012,73.727 123.012,75.844 122.403,76.454 121.524,76.454 117.856,80.122 117.856,81.506 117.069,82.293 115.385,82.293 114.529,80.981 115.011,76.542 117.5,74.054
Drives_power on Top Layer "DRIVES_POWER_L01_P003" (solid, pour order 3): 121.148,91.415 116.408,91.415 115.316,90.322 115.316,88.773 113.386,86.843 111.227,86.843 109.322,84.938 109.322,70.104 114.529,70.104 115.011,70.587 114.884,70.714 114.884,77.14 116.51,78.765 117.627,79.883 117.627,81.788 121.945,86.106 121.945,90.532
+5V on Top Layer "+5V_L01_P001" (solid, pour order 1): 86.976,79.934 86.976,78.353 86.995,78.334 91.161,78.334 91.161,79.899 91.196,79.934
NetC18_1 on Top Layer "NETC18_1_L01_P000" (solid, pour order 0): 78.234,84.557 86.976,84.557 86.976,80.359 86.94,80.323 78.224,80.323
GND on Bottom Layer "GND_L02_P007" (solid, pour order 7): 72.009,57.912 cw(c72.009,60.452) 69.469,60.452 69.469,91.694 cw(c71.247,91.694) 71.247,93.472 158.369,93.472 cw(c158.369,91.44) 160.401,91.44 160.401,60.452 cw(c157.861,60.452) 157.861,57.912
Drives_power on Bottom Layer "DRIVES_POWER_L02_P004" (solid, pour order 4): 115.926,90.79 115.926,85.395 118.548,82.772 136.423,82.772 137.82,81.375 137.82,79.353 138.205,78.969 140.767,78.969 141.478,79.68 141.478,83.896 138.659,86.716 121.869,86.716 120.32,88.265 120.32,90.195 119.355,91.161 116.42,91.161
VCC on Bottom Layer "VCC_L02_P002" (solid, pour order 2): 72.39,90.856 72.39,87.655 72.974,87.655 78.867,81.763 107.823,81.763 109.144,80.442 109.144,78.638 114.833,78.638 114.935,78.74 115.011,84.709 112.065,87.655 87.147,87.655 85.014,85.522 81.28,85.522 79.502,87.3 79.502,88.392 76.784,91.11 72.517,91.11

## Keep-outs
Keep-Out Layer:
  the board outline again, w0.254

## Silkscreen, mask and mechanical layers (free items; w line width, h text height)
Top Overlay:
  drawing of 4 lines, arcs and shapes, not listed
  text "SERVO" at 101.727,92.202 h1.6
  text "GEAR" at 149.078,84.335 h2
  text "SELECTOR" at 122.555,84.201 h2
  text "ENDSTOP" at 99.77,83.7 h2
  text "-" at 73.989,79.624 h0.89 r180
  text "ENCODER" at 99.77,74.81 h2
  text "*1" at 94.809,68.412 h0.89 r90
  text "EXTRA" at 101.473,66.04 h2
Bottom Overlay:
  text "12/24V" at 76.962,90.551 h0.89 r90
  text "+5V" at 107.188,87.757 h0.89 r90
  text "IO21" at 102.429,87.684 h0.89 r90
  text "GND" at 104.969,87.684 h0.89 r90
  text "B1" at 125.162,87.665 h0.89 r90
  text "B2" at 127.702,87.665 h0.89 r90
  text "A2" at 130.242,87.665 h0.89 r90
  text "A1" at 132.782,87.665 h0.89 r90
  text "B1" at 149.419,87.538 h0.89 r90
  text "B2" at 151.959,87.538 h0.89 r90
  text "A2" at 154.499,87.538 h0.89 r90
  text "A1" at 157.039,87.538 h0.89 r90
  text "GND" at 112.313,86.992 h0.89 r180
  text "12-48V" at 119.547,86.408 h0.89
  text "GND" at 76.835,84.836 h0.89 r90
  text "IO20" at 102.362,78.867 h0.89 r90
  text "GND" at 104.969,78.794 h0.89 r90
  text "VCC" at 107.509,78.794 h0.89 r90
  text "GND" at 104.969,69.904 h0.89 r90
  text "VCC" at 107.509,69.904 h0.89 r90
  text "IO19" at 102.362,69.85 h0.89 r90
  text "GND" at 104.969,61.014 h0.89 r90
  text "VCC" at 107.509,61.014 h0.89 r90
  text "IO13" at 102.235,60.96 h0.89 r90
Top Solder:
  drawing of 3 lines, arcs and shapes, not listed
  text "V1.0" at 143.637,59.944 h0.6
  text "ERCF Fly Board" at 133.604,59.817 h1.5

## Dimensions
158.444,93.469 to 157.809,57.909 on Top Overlay
69.544,91.564 to 160.349,91.564 on Top Overlay

## Text inside footprints (layer, text, board x,y; h text height)
J1: Mechanical 15 "J2" at 103.848,86.469 h1 r26
J3: Mechanical 15 "J2" at 103.848,68.706 h1 r26
J4: Mechanical 15 "J2" at 103.848,77.623 h1 r26
power1: Mechanical 15 "J5" at 73.414,87.541 h1 r270
power2: Mechanical 15 "J5" at 116.472,89.73 h1 r180